# Altium PCB MODEM1.PcbDoc
Units mm, origin at the board's own origin, x right, y up, seen from the top; angles counter-clockwise.
Board outline 93 x 45 mm, 2 copper layers (Top Layer, Bottom Layer); 38 components, 28 nets, 126 pads, 12 vias.
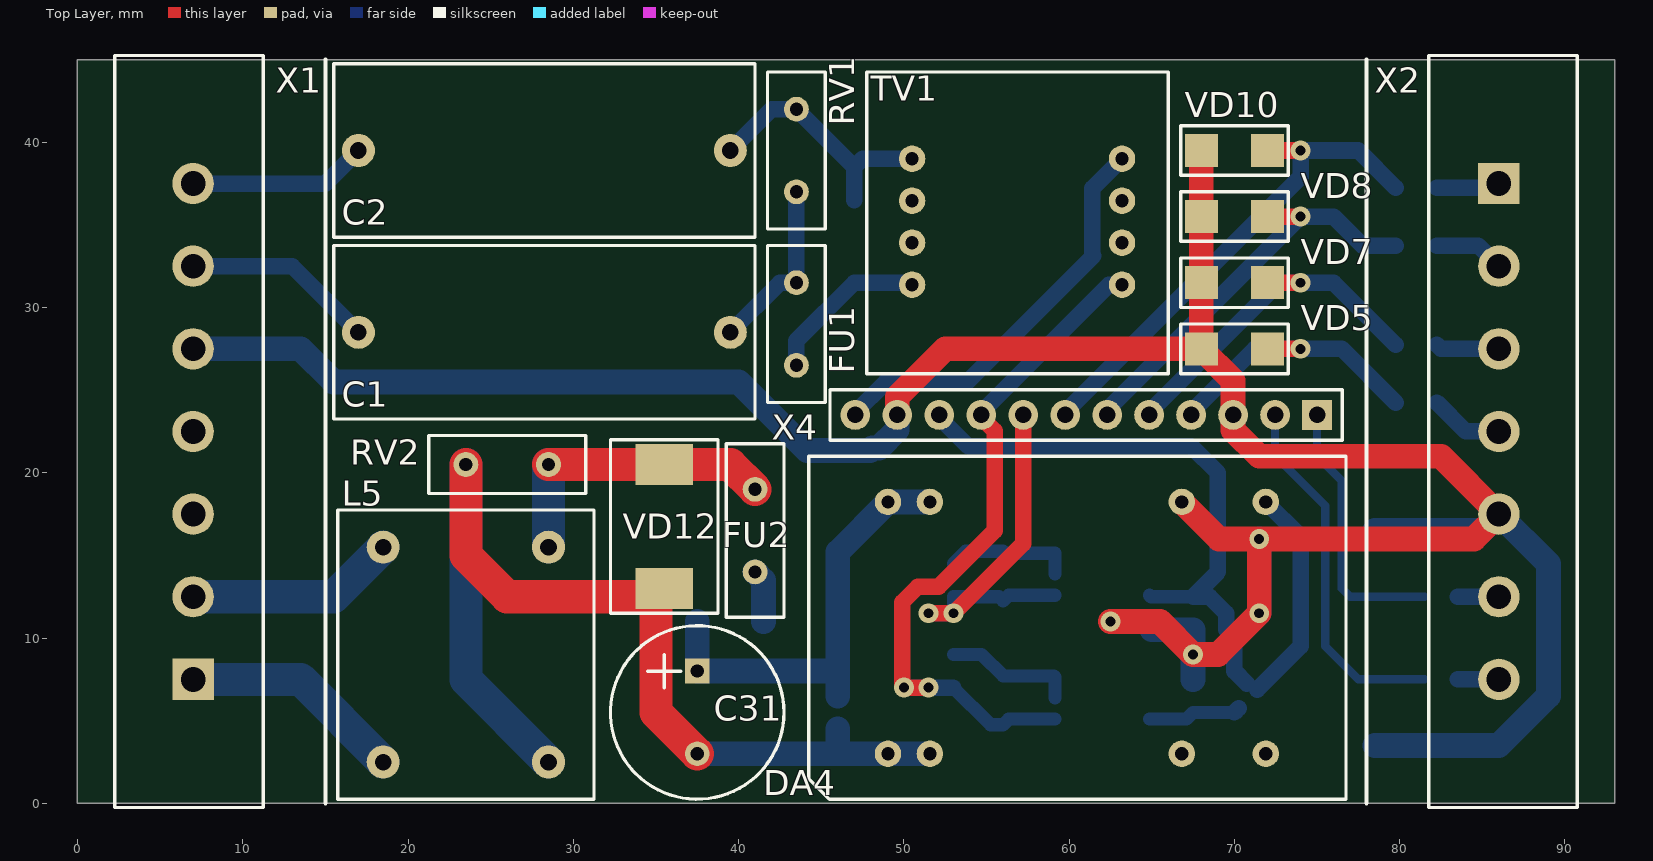
[diagram p0: Top Layer view]
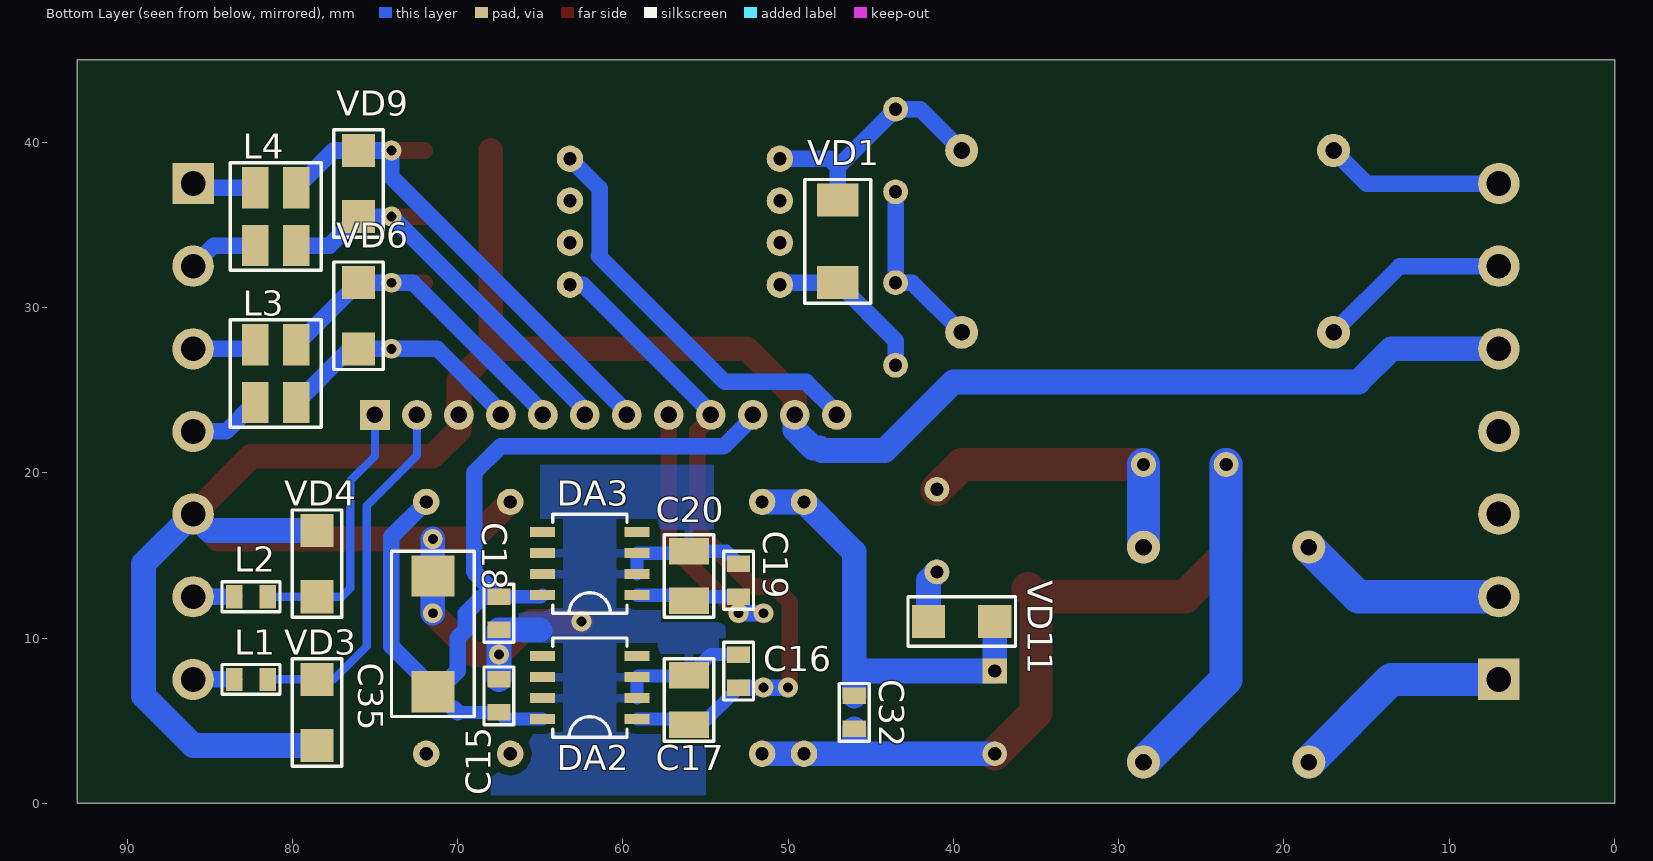
[diagram p1: Bottom Layer view, seen from below]

## Layer stack, top to bottom
Top Solder: solder mask 0.0102, Solder Resist, Dk 3.5
Top Layer: signal copper 0.0356
Dielectric 1: dielectric 0.32, FR-4, Dk 4.8
Bottom Layer: signal copper 0.0356
Bottom Solder: solder mask 0.0102, Solder Resist, Dk 3.5

## Board outline
0,0 0,45 93,45 93,0

## Design rules (kind name [scope] priority, off if disabled: settings)
Clearance [All] p1: gap=0.5
NetAntennae [All] p1: netantennaetolerance=100
PolygonConnect PolygonConnect_1 [InNet('GND')] p1: connectstyle=Relief reliefconductorwidth=0.5 reliefentries=4 polygonreliefangle="90 Angle" airgapwidth=0.5
PolygonConnect [All] p2: connectstyle=Relief reliefconductorwidth=0.5 reliefentries=4 polygonreliefangle="90 Angle" airgapwidth=0.5
RoutingCorners [All] p1: cornerstyle=45-Degree minsetback=2.5 maxsetback=2.5
RoutingVias [All] p1: holewidth=0.6 width=1.2 viastyle="Through Hole" minholewidth=0.6 minwidth=1.2 maxholewidth=0.6 maxwidth=1.2
SolderMaskExpansion [All] p1: expansion=0.1
Width [All] p1: maxlimit=2.5 minlimit=0.5 preferedwidth=1
28 further rules are at their usual default settings.

## Components (designator, comment, footprint, x,y, rotation, side; value= is the part's Value field where it differs from the comment)
C1 "1.5uF" TS02-22.5 17,28.5 r0 top
C2 "1.5uF" TS02-22.5 17,39.5 r0 top
C15 "0.1uF" CC0805 67.5,6.5 r270 bottom
C16 "0.1uF" CC0805 53,8 r270 bottom
C17 "10uF" SMB 56,8 r270 bottom
C18 "0.1uF" CC0805 67.5,11.5 r90 bottom
C19 "0.1uF" CC0805 53,13.5 r270 bottom
C20 "10uF" SMB 56,15.5 r270 bottom
C31 "SH050M0220B5S-1012" SH050-1019 37.5,3 r90 top
C32 "0.1uF" CC0805 46,5.5 r90 bottom
C35 "47uF" SMD 71.5,14 r270 bottom
DA2 "MC78L08ABDR2G" L78L06ABD 62,7 r0 bottom
DA3 "L78L33ABD" L78L06ABD 62,14.5 r0 bottom
DA4 "TEN 3-2413WIN-HI" TEN3-2412WIN 46.5,3 r0 top
FU1 "TRF250-120" TRF250-120 43.5,31.5 r270 top
FU2 "RXEF075" RXEF075 41,19 r270 top
L1 "MMZ2012Y202B" MMZ2012Y202B 82.5,7.5 r0 bottom
L2 "MMZ2012Y202B" MMZ2012Y202B 82.5,12.5 r0 bottom
L3 "DLW5BTN102SQ2L" DLW5BTN 81,26 r0 bottom
L4 "DLW5BTN102SQ2L" DLW5BTN 81,35.5 r0 bottom
L5 "UU10LF" UU10LF 18.5,2.5 r0 top
RV1 "JVR10N180M87PU5" JVR07N330 43.5,37 r90 top
RV2 "JVR10N390K87PU5" JVR07N330 28.5,20.5 r180 top
TV1 "LM-NP-1001" LM-NP-1001 50.5,39 r270 top
VD1 "SM6T6V8CA" SM6T6V8CA 47,36.5 r270 bottom
VD3 "SMAJ15CA" SMAJ6.0CA 78.5,3.5 r90 bottom
VD4 "SMAJ15CA" SMAJ6.0CA 78.5,16.5 r270 bottom
VD5 "SMAJ5.0CA" SMAJ6.0CA 72,27.5 r180 top
VD6 "SMAJ5.0CA" SMAJ6.0CA 76,31.5 r270 bottom
VD7 "SMAJ5.0CA" SMAJ6.0CA 68,31.5 r0 top
VD8 "SMAJ5.0CA" SMAJ6.0CA 72,35.5 r180 top
VD9 "SMAJ5.0CA" SMAJ6.0CA 76,39.5 r270 bottom
VD10 "SMAJ5.0CA" SMAJ6.0CA 68,39.5 r0 top
VD11 "SS14" SS14 41.5,11 r180 bottom
VD12 "SMCJ30CA" SMCJ28A 35.5,13 r90 top
X1 "8113_S/07" 8113_S/07 7,7.5 r90 top
X2 "8113_S/07" 8113_S/07 86,37.5 r270 top
X4 "PLS-12" PLS-12 75,23.5 r180 top

## Footprints (in the part's own frame and the unit in brackets; to place one, negate y for a bottom-side part, rotate by r counter-clockwise, add the part's x,y. Pads: shape width x height; smd on the part's side, far side on the other; paste and mask are expansions set on the pad)
8113_S/07 [mm]
  rect 2.5x2.5 hole 1.5: 1(0,0)
  round 2.5 hole 1.5: 2(5,0) 3(10,0) 4(15,0) 5(20,0) 6(25,0) 7(30,0)
  silkscreen extent -7.75,-4.25 37.75,4.75
CC0805 [mm]
  rect 1x1.4 smd: 1(-1,0) 2(1,0)
  silkscreen extent -1.75,-0.9 1.75,0.9
DLW5BTN [mm]
  rect 1.6x2.5 smd mask+0.05: 1(-1.25,-1.75) 2(1.25,-1.75) 3(1.25,1.75) 4(-1.25,1.75)
  silkscreen extent -2.75,-3.25 2.75,3.25
JVR07N330 [mm]
  round 1.5 hole 0.8: 1(0,0) 2(5,0)
  silkscreen extent -2.25,-1.75 7.25,1.75
L78L06ABD [mm]
  rect 1.5x0.6 smd: 1(-2.857,1.905) 2(-2.857,0.635) 3(-2.857,-0.635) 4(-2.857,-1.905) 5(2.857,-1.905) 6(2.857,-0.635) 7(2.857,0.635) 8(2.857,1.905)
  silkscreen extent -2.25,-3 2.25,3
LM-NP-1001 [mm]
  round 1.6 hole 0.8: 1(0,0) 2(2.54,0) 3(5.08,0) 4(7.62,0) 5(7.62,12.7) 6(5.08,12.7) 7(2.54,12.7) 8(0,12.7)
  silkscreen extent -5.25,-2.75 13,15.5
MMZ2012Y202B [mm]
  rect 1x1.4 smd: 1(-1,0) 2(1,0)
  silkscreen extent -1.75,-0.9 1.75,0.9
PLS-12 [mm]
  rect 1.8x1.8 hole 1: 1(0,0)
  round 1.8 hole 1: 2(2.54,0) 3(5.08,0) 4(7.62,0) 5(10.16,0) 6(12.7,0) 7(15.24,0) 8(17.78,0) 9(20.32,0) 10(22.86,0) 11(25.4,0) 12(27.94,0)
  silkscreen extent -1.52,-1.52 29.46,1.52
RXEF075 [mm]
  round 1.5 hole 0.8: 1(0,0) 2(5,0)
  silkscreen extent -2.75,-1.75 7.75,1.75
SH050-1019 [mm]
  round 1.5 hole 0.8: 1(0,0)
  rect 1.5x1.5 hole 0.8: 2(5,0)
  silkscreen extent -2.75,-5.25 7.75,5.25
SM6T6V8CA [mm]
  rect 2x2.5 smd: 1(0,0) 2(5,0)
  silkscreen extent -1.25,-2 6.25,2
SMAJ6.0CA [mm]
  rect 2x2 smd: 1(0,0) 2(4,0)
  silkscreen extent -1.25,-1.5 5.25,1.5
SMB [mm]
  rect 1.6x2.4 smd: 1(0.25,0) 2(3.25,0)
  silkscreen extent -0.75,-1.5 4.25,1.5
SMCJ28A [mm]
  rect 2.5x3.5 smd: 1(0,0) 2(7.5,0)
  silkscreen extent -1.5,-3.25 9,3.25
SMD [mm]
  rect 2.5x2.6 smd: 1(0.25,0) 2(7.25,0)
  silkscreen extent -1.25,-2.5 8.75,2.5
SS14 [mm]
  rect 2x2 smd: 1(0,0) 2(4,0)
  silkscreen extent -1.25,-1.5 5.25,1.5
TEN3-2412WIN [mm]
  round 1.6 hole 0.8: 2(2.54,0) 3(5.08,0) 9(20.32,0) 11(25.4,0) 14(25.4,15.24) 16(20.32,15.24) 22(5.08,15.24) 23(2.54,15.24)
  silkscreen extent -2.25,-2.75 30.25,18
TRF250-120 [mm]
  round 1.5 hole 0.8: 1(0,0) 2(5,0)
  silkscreen extent -2.25,-1.75 7.25,1.75
TS02-22.5 [mm]
  round 2 hole 1: 1(0,0) 2(22.5,0)
  silkscreen extent -1.5,-5.25 24,5.25
UU10LF [mm]
  round 2 hole 1: 1(0,0) 2(10,0) 3(0,13) 4(10,13)
  silkscreen extent -2.75,-2.25 12.75,15.25

## Part data
C1 C2 C15 C16 C18 C19 C32: library part CC1206
C17 C20 C31 C35: library part SR-6
DA2: library part L78L06ABD
DA4: library part TEN3-2412WIN
FU2: library part TRF250-120
L3 L4: library part DLW31SN
L5: library part TRANS
RV1 RV2: library part JVR14N361
VD3 VD4 VD5 VD6 VD7 VD8 VD9 VD10: library part SMAJ6.0CA
VD12: library part SM6T6V8CA

## Via types
v1: diameter 1.2, hole 0.6, Top Layer to Bottom Layer, 12 vias

## Nets (pads, with @x,y where several pads share a name; then routed paths per layer and width w, separated by ;. In a path a pad name is that pad's centre, name@x,y a point inside that pad or via, vN(x,y) a via of type N, cw(c..) or ccw(c..) an arc to the next point about the centre after c; other vN are vias at no path point)
232-RX: L2.2 X2.6 | length 2.5
  Bottom Layer w1: L2.2 X2.6
232-TX: L1.2 X2.7 | length 2.5
  Bottom Layer w1: L1.2 X2.7
422-Y: L4.3 X2.2 | length 4.3
  Bottom Layer w1: L4.3 84.75,33.75 X2.2
422-Z: L4.2 X2.1 | length 3.9
  Bottom Layer w1: L4.2 85.75,37.25 X2.1
485-A: L3.3 X2.4 | length 4.5
  Bottom Layer w1: L3.3 84,22.5 X2.4
485-B: L3.2 X2.3 | length 3.9
  Bottom Layer w1: L3.2 82.5,27.5 X2.3
+3.3V: C19.2 C20.2 DA3.1 X4.8 | length 24.1
  Top Layer w1: v1(51.5,11.5) v1(53,11.5) 57.22,15.72 X4.8
  Bottom Layer w0.8: v1(53,11.5) C19.2 55.75,12.5 C20.2 56.345,12.595 DA3.1
  Bottom Layer w1: v1(51.5,11.5) v1(53,11.5)
+8V: C16.2 C17.2 DA2.1 TV1.5 X4.9 | length 43.5
  Top Layer w1: v1(51.5,7) v1(50,7) 49.9,7.1 49.9,12.163 50.837,13.1 52.1,13.1 55.5,16.5 55.5,22.533 54.68,23.353 X4.9
  Bottom Layer w0.8: C16.2 55.25,4.75 C17.2 56.345,5.095 DA2.1
  Bottom Layer w1: v1(50,7) C16.2 ; X4.9 54.68,23.647 62.413,31.38 TV1.5
+15V: C15.2 C18.2 C35.2 DA2.8 DA3.8 DA4.14 X4.10 | length 55.4
  Bottom Layer w0.8: DA2.8 67.095,5.095 C15.2 70,5.5 ; DA3.8 64.952,12.5 C18.2
  Bottom Layer w1: X4.10 52.14,23.353 53.893,21.6 67.4,21.6 69,20 69,14 C18.2 68.5,12.5 69.5,11.5 69.5,10.5 70,10 70,8 C35.2@70.75,7.25 ; 70,5.5 C35.2@70.25,5.75 ; C35.2@71.375,6.875 74,9.5 74,16.14 DA4.14
A: L3.4 VD5.1 VD6.2 X4.4 | length 17.5
  Top Layer w1: VD5.1 v1(74,27.5)
  Bottom Layer w1: X4.4 67.38,23.647 71.233,27.5 v1(74,27.5) VD6.2 76.5,27.5 L3.4
B: L3.1 VD6.1 VD7.2 X4.5 | length 21.9
  Top Layer w1: VD7.2 v1(74,31.5)
  Bottom Layer w1: X4.5 64.84,23.647 72.693,31.5 v1(74,31.5) VD6.1 L3.1
GND: C15.1 C16.1 C17.1 C18.1 C19.1 C20.1 C35.1 DA2.2 DA2.3 DA2.6 DA2.7 DA3.2 DA3.3 DA3.6 DA3.7 DA4.16 VD3.1 VD4.1 VD5.2 VD7.1 VD8.2 VD10.1 X1.5 X2.5 X4.3 X4.11 | length 196.8
  Top Layer w1.5: X4.11 49.6,24.6 52.5,27.5 VD5.2 ; v1(62.5,11) 65.5,11 v1(67.5,9) 69,9 v1(71.5,11.5) v1(71.5,16) ; DA4.16 69.06,16 v1(71.5,16) ; VD10.1 VD8.2 VD7.1 VD5.2 ; VD5.2 69.92,25.58 X4.3 69.92,22.58 71.5,21 82.5,21 X2.5 84.5,16 v1(71.5,16)
  Bottom Layer w0.8: C16.1 54.705,9 56,7.705 59.073,7.705 DA2.3 DA2.2@59.143,6.395 ; C19.1 53.75,15.25 C20.1 56.115,15.135 DA3.3 DA3.2@59.143,13.895
  Bottom Layer w1.5: X1.5 13.5,27.5 15.5,25.5 40,25.5 44.15,21.35 47.951,21.35 48.101,21.5 48.5,21.5 49.6,22.6 X4.11 ; 65,10.5 C18.1 v1(67.5,9) C15.1 ; v1(71.5,11.5) C35.1 v1(71.5,16) ; VD3.1 86,3.5 89,6.5 89,14.5 X2.5 85,16.5 VD4.1
IN-OUT: TV1.8 X4.12 | length 25.1
  Bottom Layer w1: X4.12 47.06,23.647 48.913,25.5 53.837,25.5 61.456,33.119 61.4,33.174 61.4,37.206 63.194,39 TV1.8
LINE1: C1.1 X1.6 | length 11.7
  Bottom Layer w1: X1.6 13,32.5 C1.1
LINE2: C2.1 X1.7 | length 10.8
  Bottom Layer w1: X1.7 15,37.5 C2.1
NetC1_2: C1.2 FU1.1 RV1.1 | length 10.7
  Bottom Layer w1: C1.2 42.5,31.5 FU1.1 RV1.1
NetC2_2: C2.2 RV1.2 TV1.1 VD1.1 | length 15.7
  Bottom Layer w1: C2.2 42,42 RV1.2 47,38.5 ; VD1.1 47,38.5 ; TV1.1 47.5,39 47,38.5
NetC31_1: C31.1 C32.1 DA4.2 DA4.3 L5.2 RV2.2 VD12.1 | length 64.9
  Top Layer w2: RV2.2 23.5,15 26,12.5 VD12.1@35,12.5 ; VD12.1 VD12.1@35,12.5 ; C31.1 35,5.5 VD12.1@35,12.5
  Bottom Layer w1.5: C31.1 DA4.2 DA4.3 ; 46,3 C32.1
  Bottom Layer w2: RV2.2 23.5,7.5 L5.2
NetC31_2: C31.2 C32.2 DA4.22 DA4.23 VD11.2 | length 27
  Bottom Layer w1.5: VD11.2 C31.2 46,8 ; C32.2 46,8 ; DA4.22 DA4.23 46,15.2 46,8
NetFU1_2: FU1.2 TV1.4 VD1.2 | length 10
  Bottom Layer w1: FU1.2 43.5,28 VD1.2 50.38,31.5 TV1.4
NetFU2_1: FU2.1 L5.4 RV2.1 VD12.2 | length 18.1
  Top Layer w2: RV2.1 VD12.2 39.5,20.5 FU2.1
  Bottom Layer w2: L5.4 RV2.1
NetFU2_2: FU2.2 VD11.1 | length 3.2
  Bottom Layer w1.5: FU2.2 41.5,13.5 VD11.1
RXD: L2.1 VD4.2 X4.1 | length 16.3
  Bottom Layer w0.5: X4.1 75,21 76.5,19.5 76.5,13 77,12.5 VD4.2 L2.1
SMB: L5.1 X1.1 | length 13.6
  Bottom Layer w2: X1.1 13.5,7.5 L5.1
SPB: L5.3 X1.2 | length 12.7
  Bottom Layer w2: X1.2 15.5,12.5 L5.3
TXD: L1.1 VD3.2 X4.2 | length 22.1
  Bottom Layer w0.5: X4.2 72.46,21.04 75.5,18 75.5,9.5 77.5,7.5 VD3.2 L1.1
Y: L4.4 VD8.1 VD9.2 X4.6 | length 25.3
  Top Layer w1: VD8.1 v1(74,35.5)
  Bottom Layer w1: X4.6 62.3,23.8 v1(74,35.5) VD9.2 77.75,33.75 L4.4
Z: L4.1 VD9.1 VD10.2 X4.7 | length 30.6
  Top Layer w1: VD10.2 v1(74,39.5)
  Bottom Layer w1: X4.7 59.76,23.647 74,37.887 v1(74,39.5) VD9.1 77.5,39.5 L4.1
pads on no net: DA2.4 DA2.5 DA3.4 DA3.5 DA4.9 DA4.11 TV1.2 TV1.3 TV1.6 TV1.7 X1.3 X1.4

## Polygon pours and split planes (outlines as drawn)
GND on Bottom Layer "gndb" (solid, pour order 6): 50,15.5 54.5,15.5 54.5,20.5 65,20.5 65,16.547 64.858,16.405 64.953,16.5 68,16.5 68,0.5 55,0.5 55,6 50,6

## Silkscreen, mask and mechanical layers (free items; w line width, h text height)
Top Overlay:
  lines w0.254: 15,0 15,45 ; 78,0 78,45
Mechanical 4:
  the board outline again, w0.254